# EAGLE board Batterie (EAGLE 7.6.0)
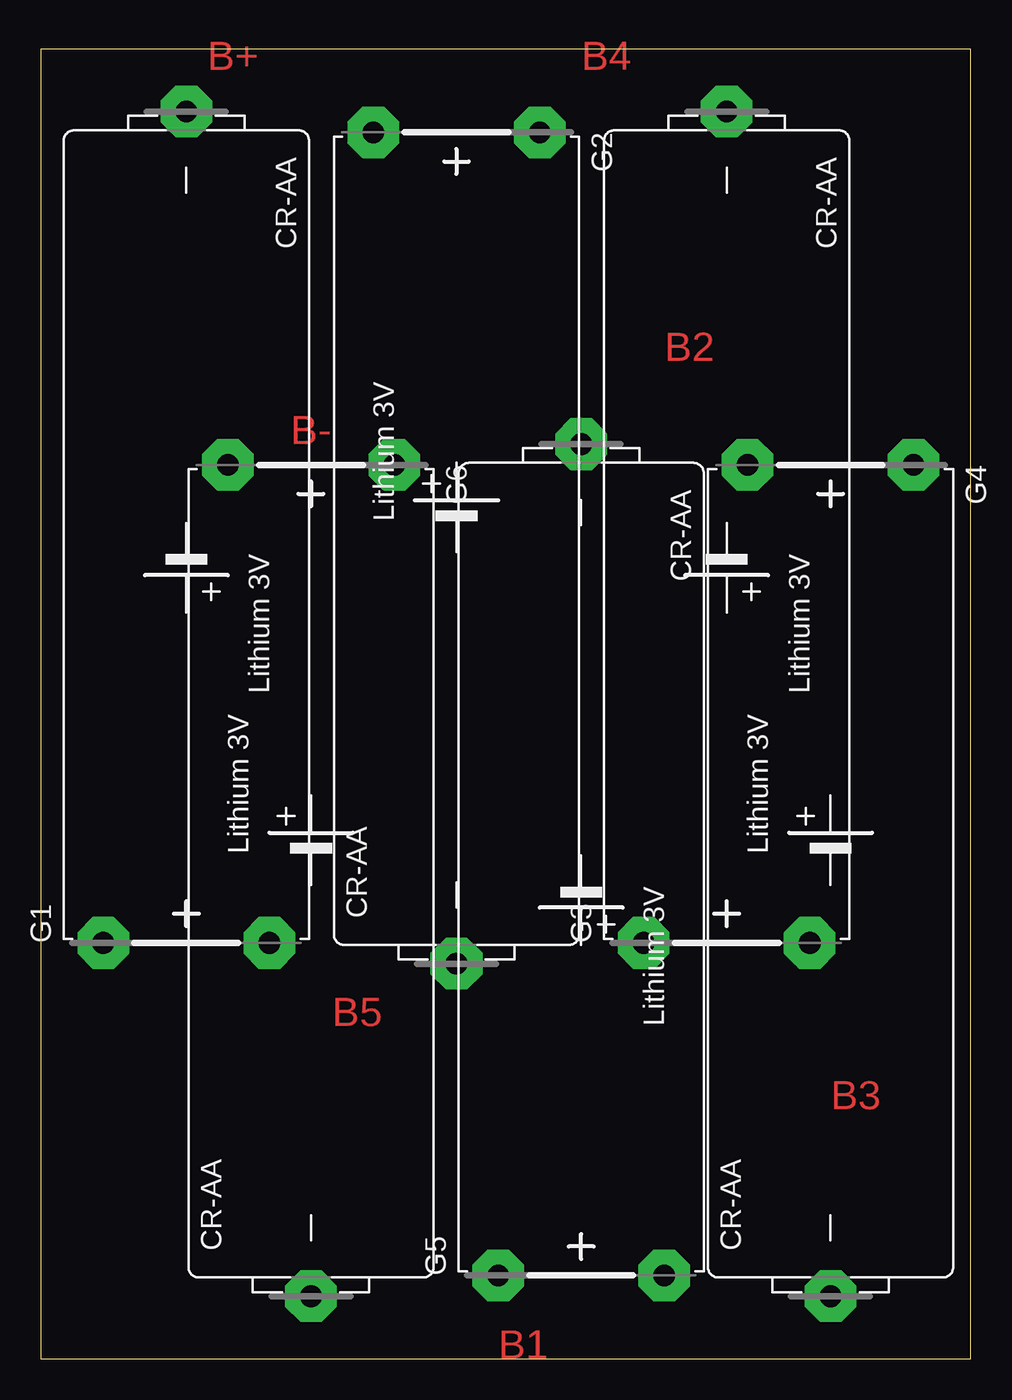
[diagram p0: board, top side]
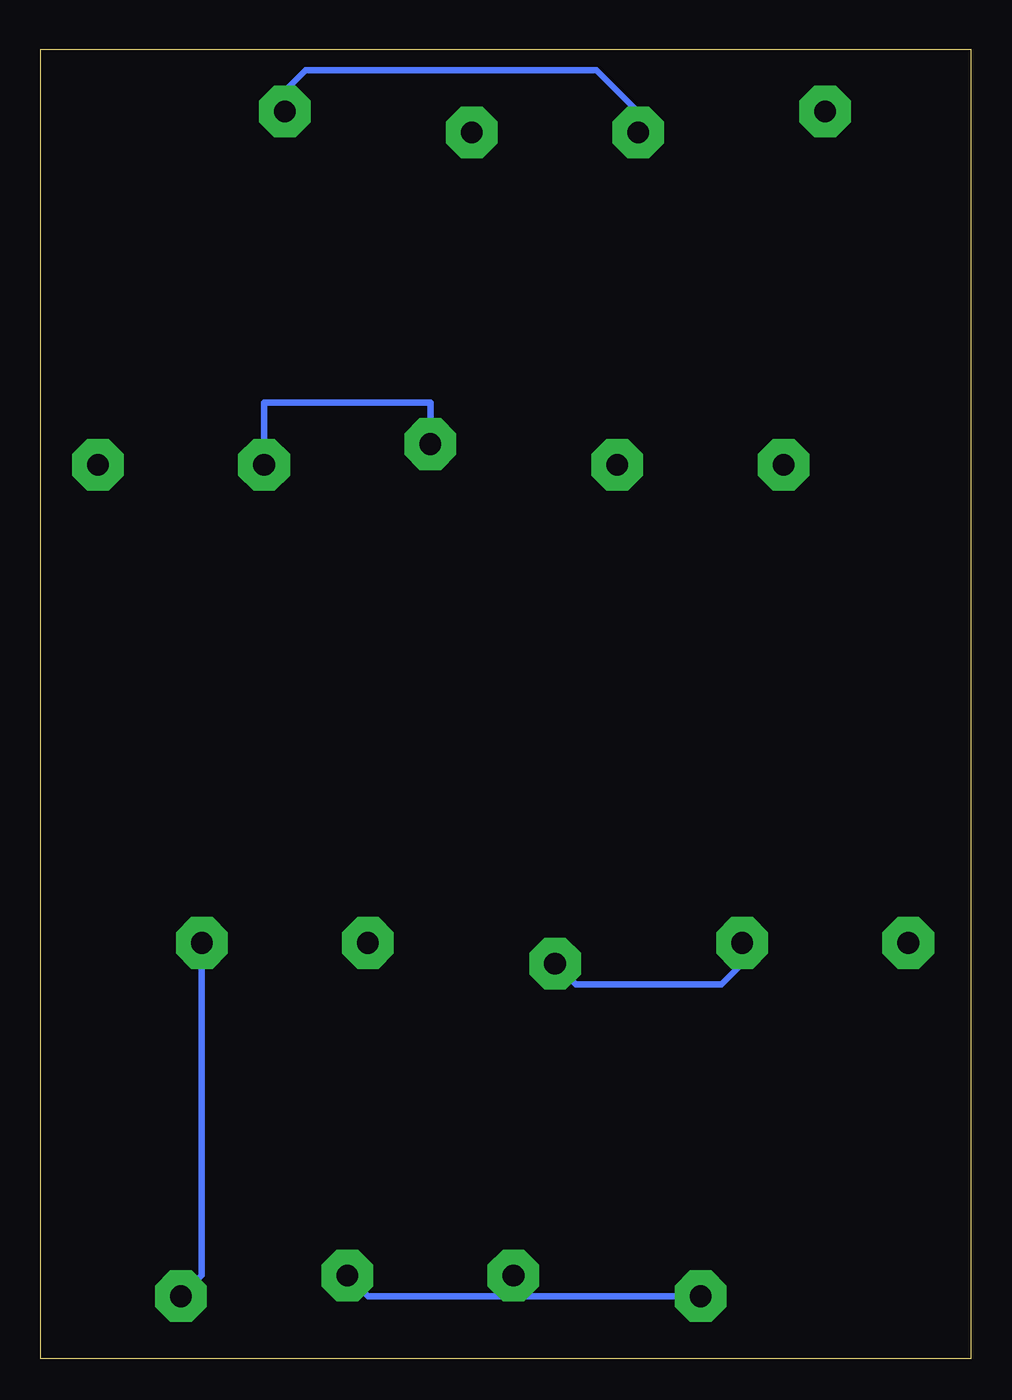
[diagram p1: board, bottom side, seen from below]

Size 56.82 x 80 mm. Coordinates in mm from the lower left corner, seen from the top.
Outline: 0,0 56.82,0 56.82,80 0,80 0,0
Copper layers (1*16): Top 0.035mm / dielectric 1.5mm / Bottom 0.035mm
Design rules "default": minimum track width 6mil, minimum drill 0.35mm, track to track 6mil, track to pad 6mil, pad to pad 6mil, via to via 6mil, smd to smd 6mil, copper to edge 40mil, drill to drill 6mil, minimum pad ring 10mil, minimum via ring 8mil, stop-mask expansion 4mil, vias tented up to drill 0mil, thermal gap 10mil

## Footprints (pad centres in the part's own frame; a part is rotated, then mirrored left to right if it is on the bottom)
CRAA = drill 1.321 pad 3.15 octagon: + -25.4,-5.08; +@1 -25.4,5.08; - 25.4,0

## Placement (x,y rotation side)
G1  CRAA  [CRAA]  8.89,50.8 90 top
G2  CRAA  [CRAA]  25.4,49.53 270 top
G3  CRAA  [CRAA]  41.91,50.8 90 top
G4  CRAA  [CRAA]  48.26,29.21 270 top
G5  CRAA  [CRAA]  33.02,30.48 90 top
G6  CRAA  [CRAA]  16.51,29.21 270 top

## Library data of the parts
G1-G6 = battery

## Nets
N$1: G1.+ G2.-
N$2: G2.+ G3.-
N$3: G3.+ G4.-
N$4: G4.+ G5.-
N$5: G5.+ G6.-

## Tracks (layer width: path | path; a pad name or v marks a point on that pad's centre or on a via)
N$1
  Bottom 0.406: G1.+ 13.97,24.13 15.24,22.86 24.13,22.86 G2.-
N$2
  Bottom 0.406: G3.- 41.91,77.47 40.64,78.74 22.86,78.74 20.32,76.2 G2.+
N$3
  Bottom 0.406: G3.+ 46.99,5.08 G4.-
N$4
  Bottom 0.406: G4.+ 43.18,58.42 33.02,58.42 G5.-
N$5
  Bottom 0.406: G6.- 36.83,3.81 G5.+

## Text on the board
Top: B+ | B4 | B2 | B- | B5 | B3 | B1